# Altium PCB PCB1.PcbDoc
Units mm, origin at the board's own origin, x right, y up, seen from the top; angles counter-clockwise.
Board outline 49.91 x 77.34 mm, 4 copper layers (Top Layer, Layer 1, Layer 2, Bottom Layer), stack 0.787 mm thick; 23 components, 20 nets, 117 pads, 8 vias.
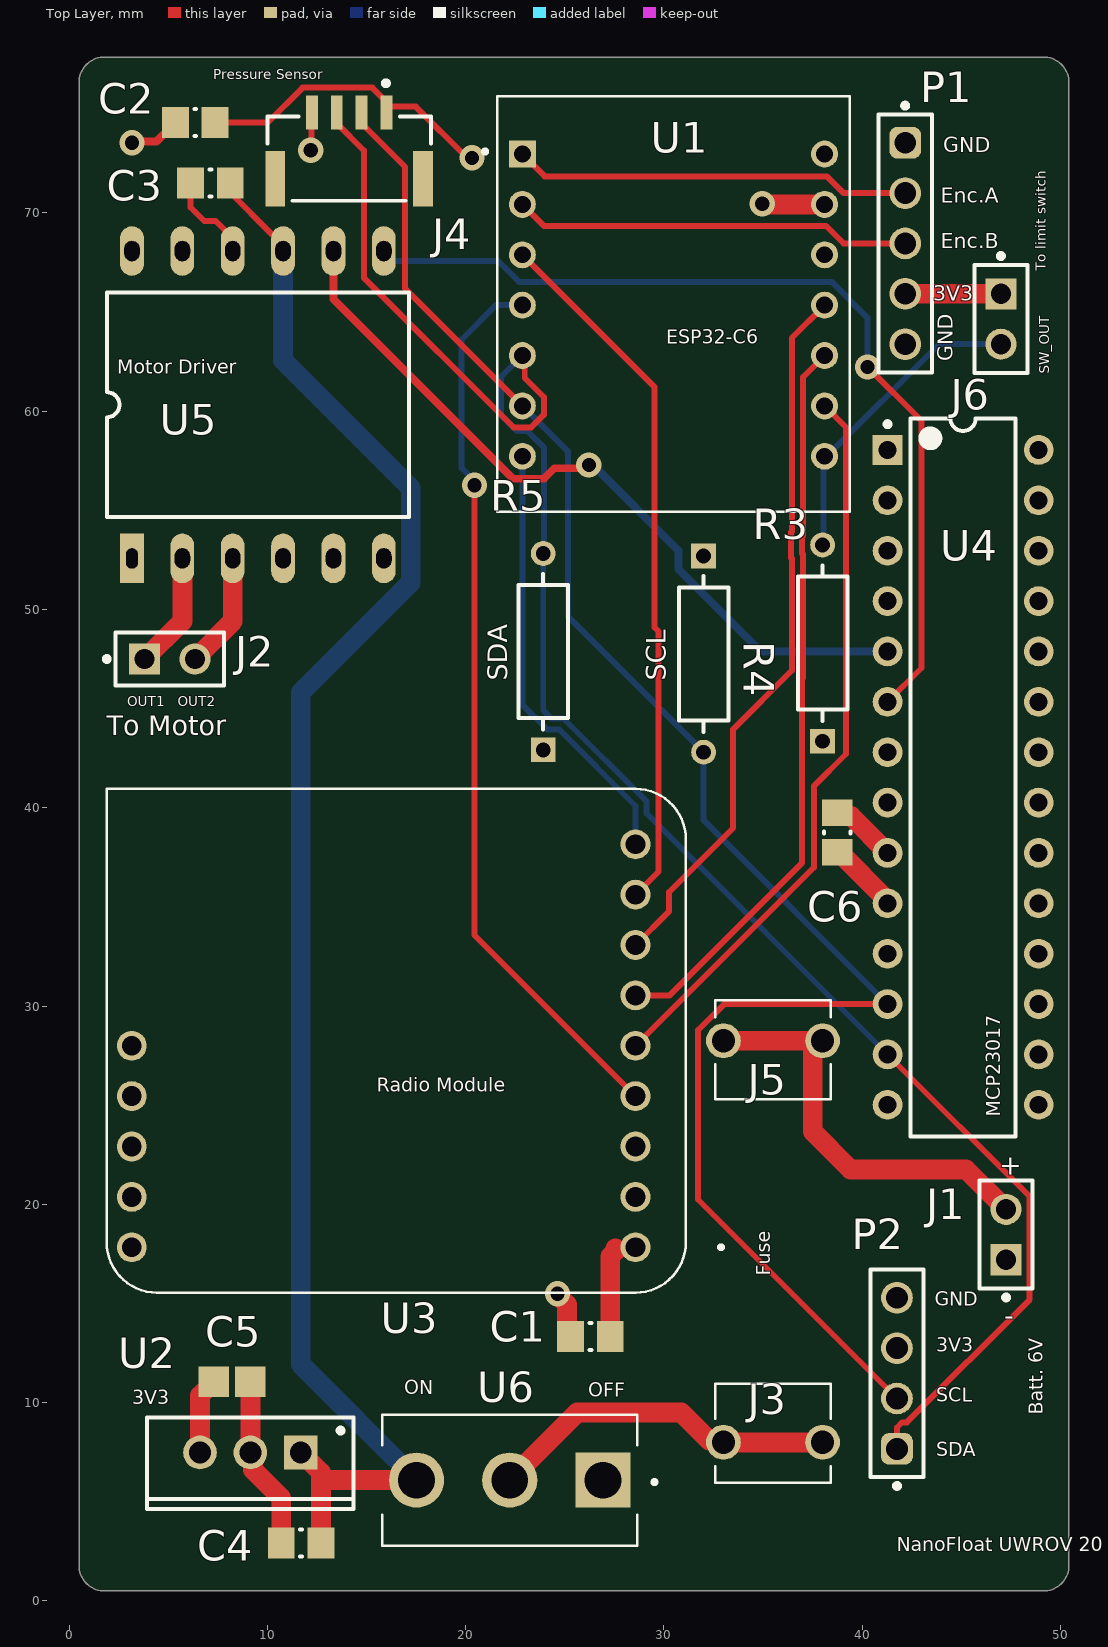
[diagram p0: Top Layer view]
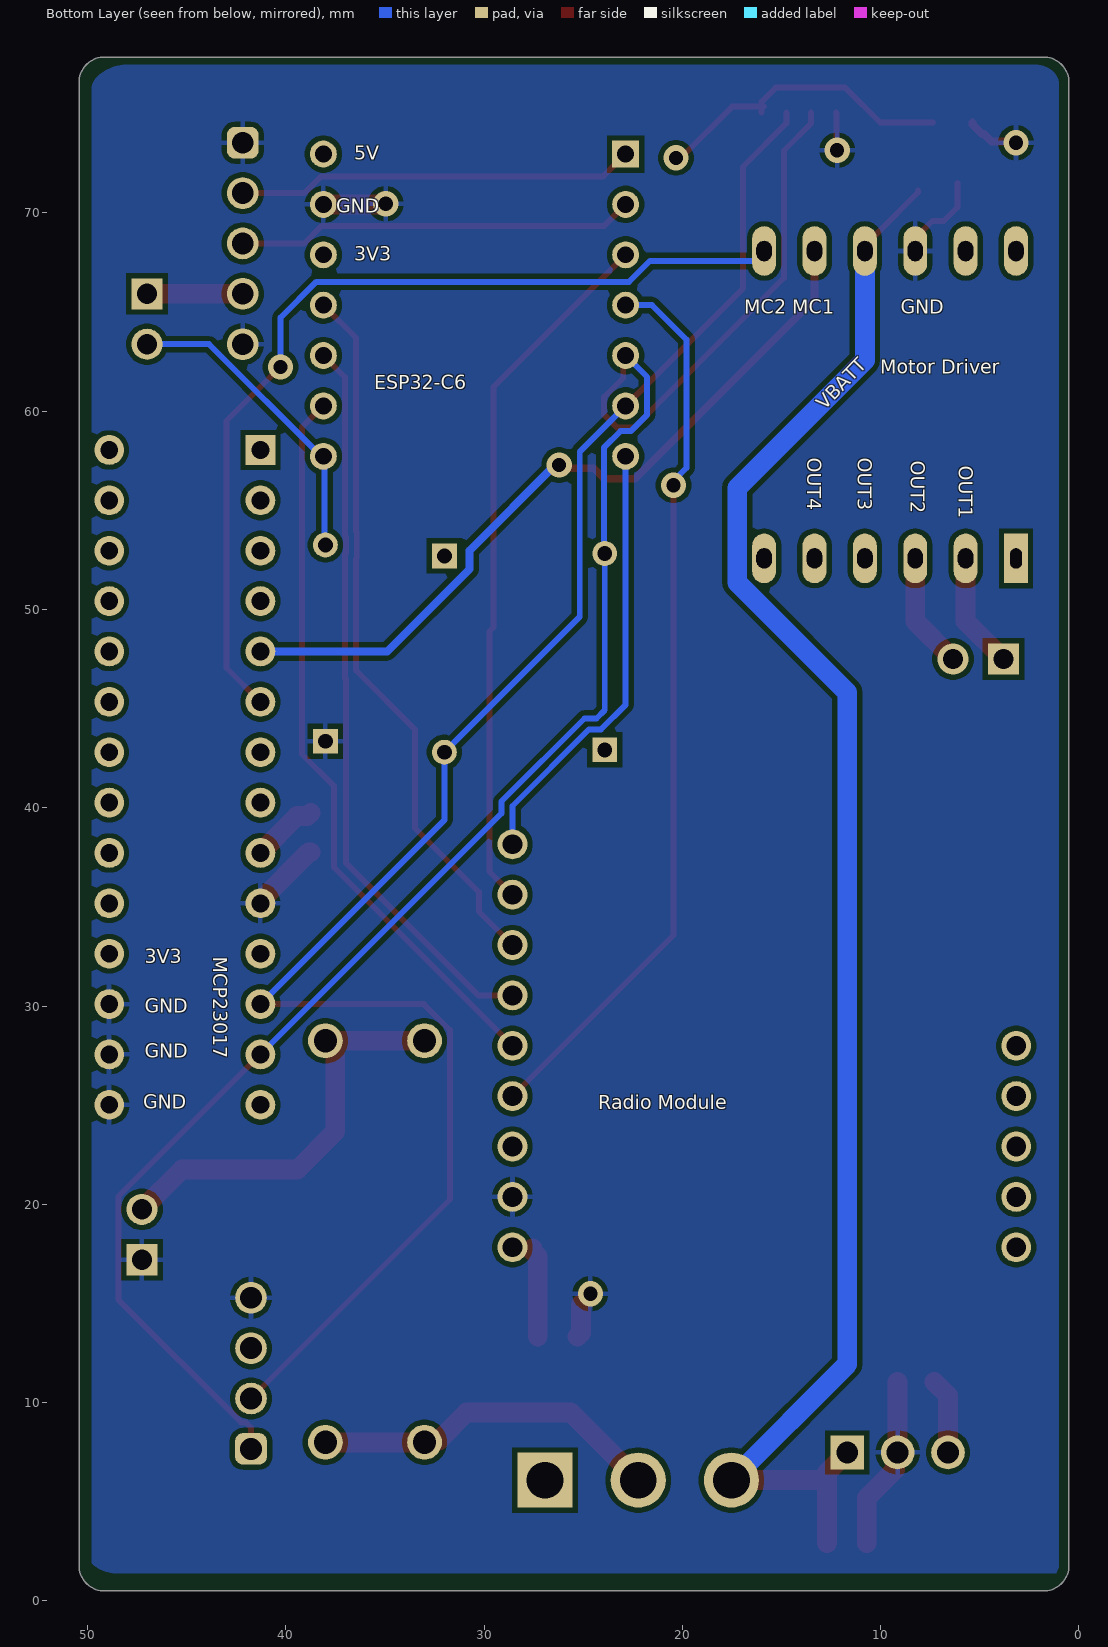
[diagram p1: Bottom Layer view, seen from below]
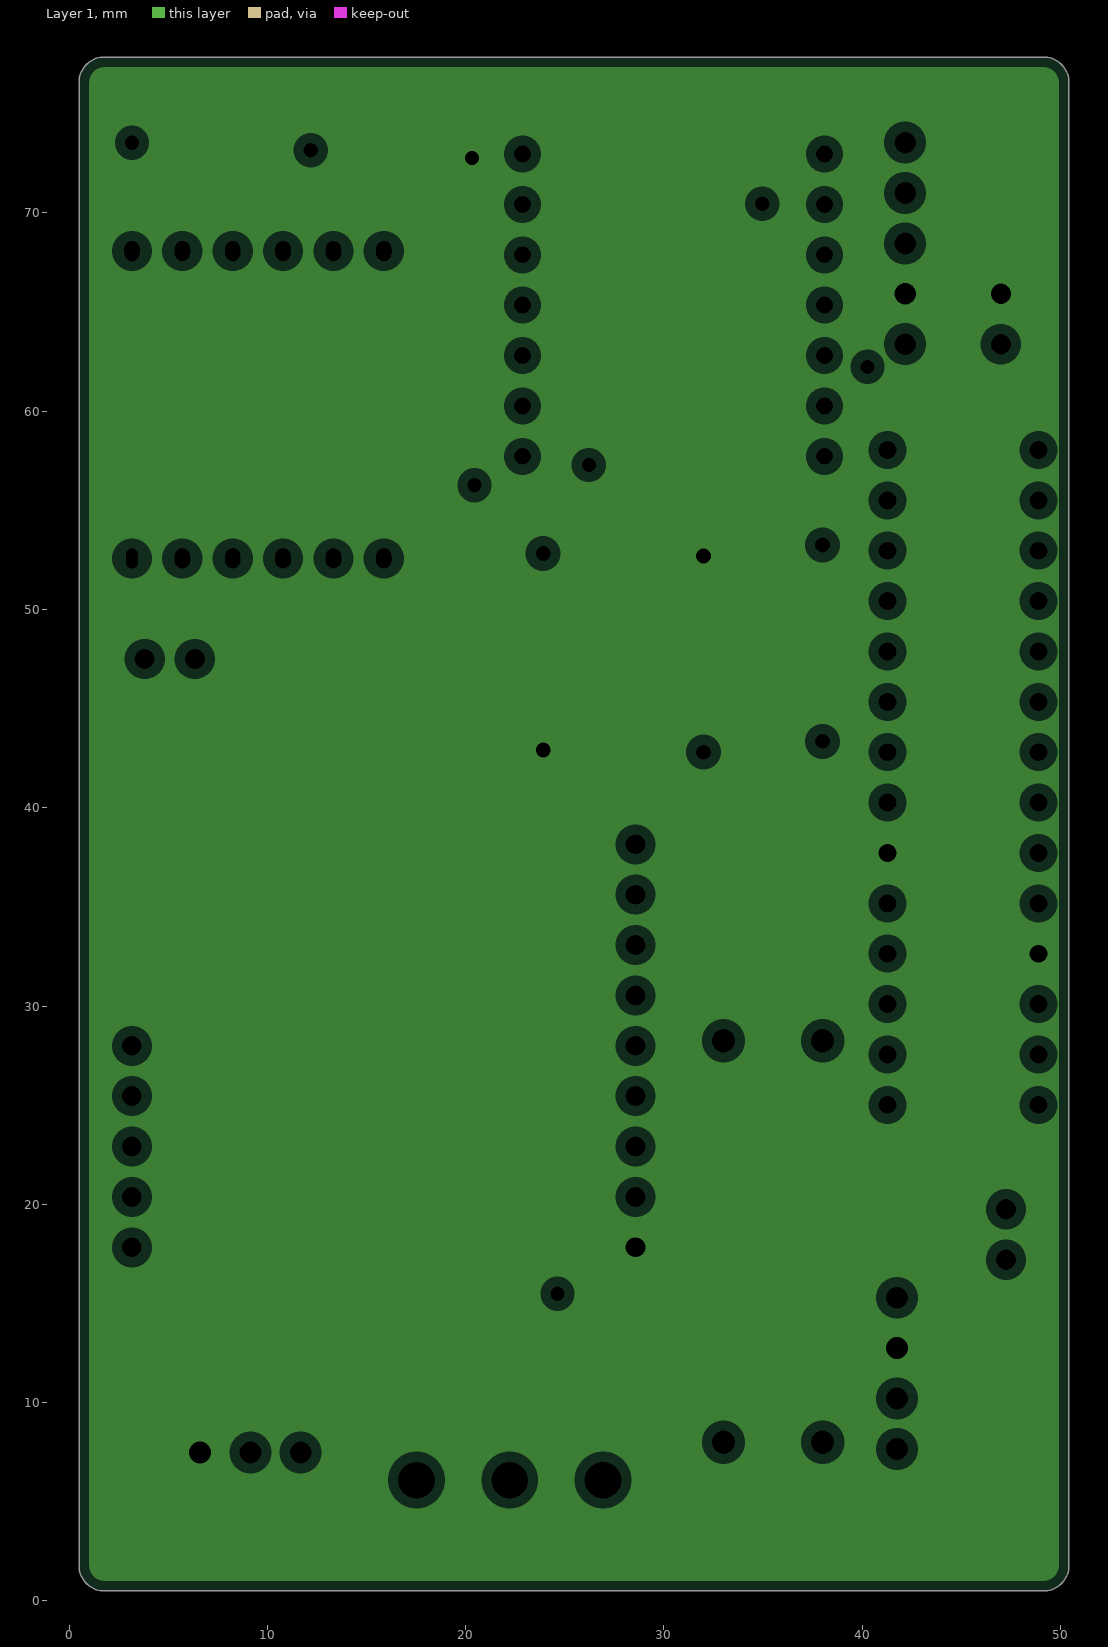
[diagram p2: Layer 1, clearances drawn from the general rule]
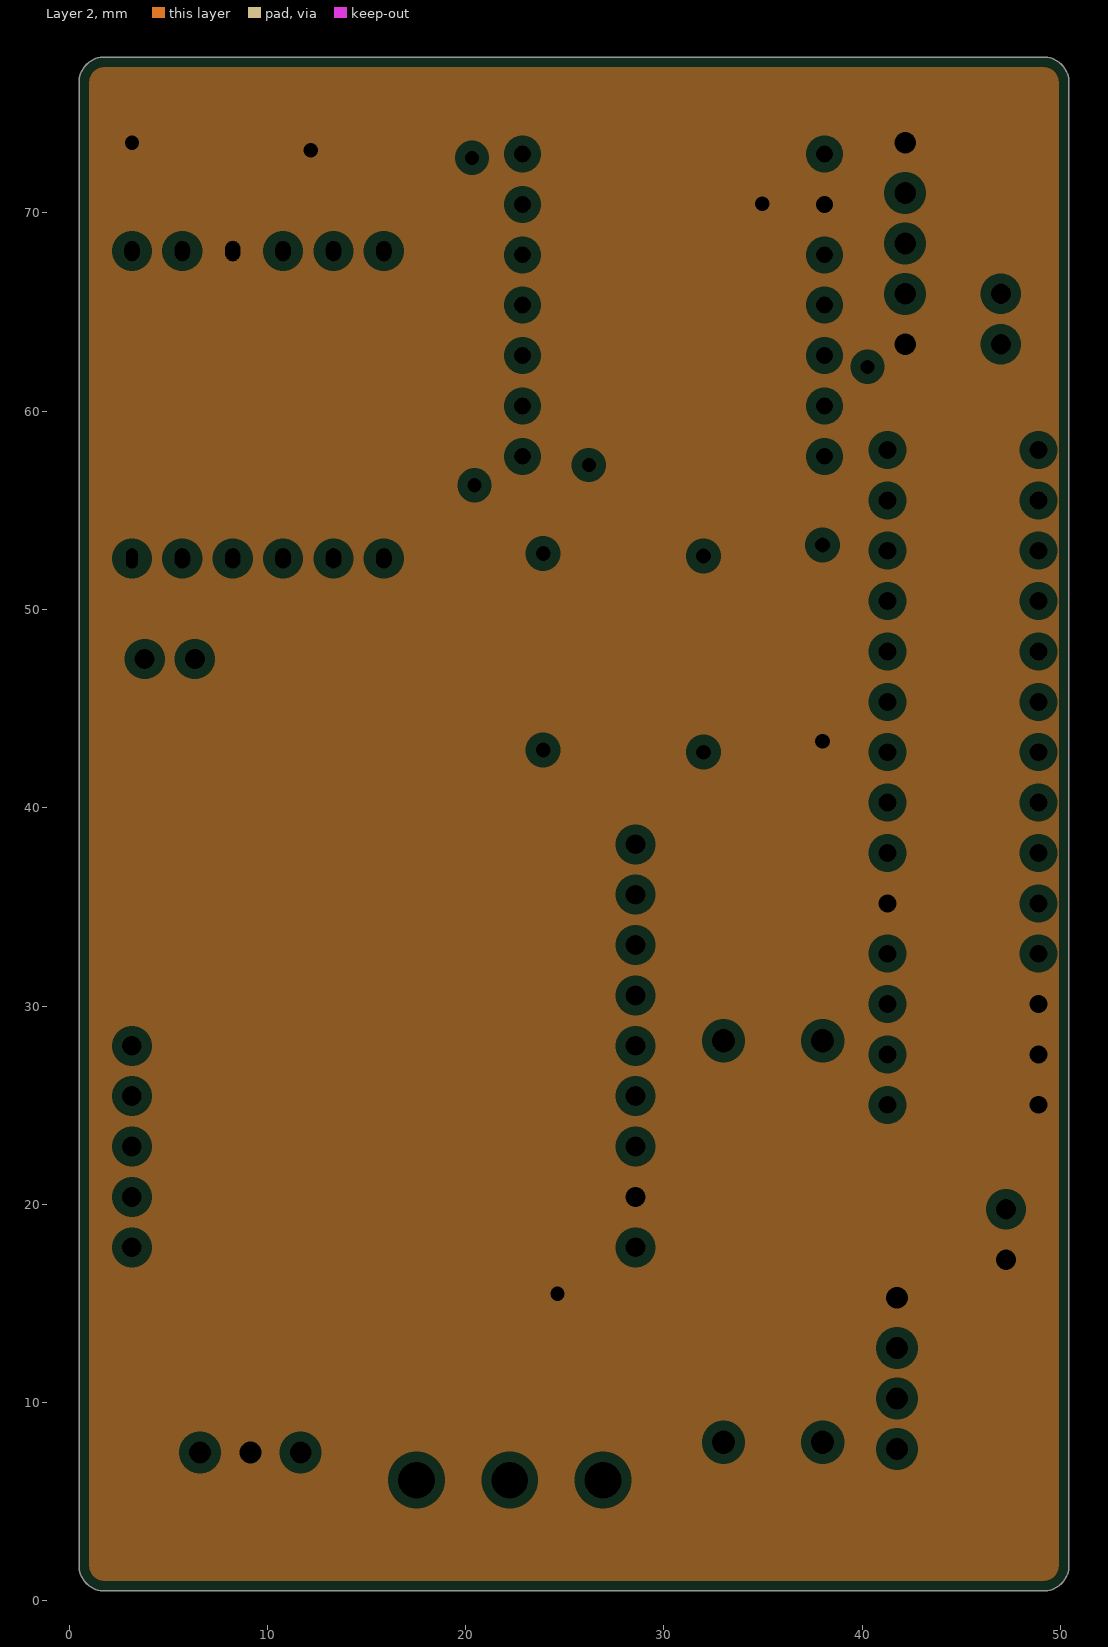
[diagram p3: Layer 2, clearances drawn from the general rule]

## Layer stack, top to bottom
Top Solder: solder mask 0.0102, Solder Resist, Dk 3.5
Top Layer: signal copper 0.0356
Dielectric 2: prepreg 0.1803, PP-021, Dk 4.4
Layer 1: plane copper 0.0175, net 3V3
Dielectric 1: dielectric 0.32, FR-4, Dk 4.8
Layer 2: plane copper 0.0175, net GND
Dielectric 3: prepreg 0.1803, PP-021, Dk 4.4
Bottom Layer: signal copper 0.0356
Bottom Solder: solder mask 0.0102, Solder Resist, Dk 3.5

## Board outline
0.508,1.778 0.508,76.581 cw(c1.778,76.581) 1.778,77.851 49.149,77.851 cw(c49.149,76.581) 50.419,76.581 50.419,1.778 cw(c49.149,1.778) 49.149,0.508 1.778,0.508 cw(c1.778,1.778)

## Design rules (kind name [scope] priority, off if disabled: settings)
Clearance [All] p1: gap=0.254 ignorepadtopadclearanceinfootprint=FALSE
PlaneClearance [All] p1: clearance=0.508
PlaneConnect [All] p1: planeconnectstyle=Relief reliefexpansion=0.508 reliefentries=4 reliefconductorwidth=0.254 reliefairgap=0.254
PolygonConnect [All] p1: connectstyle=Relief reliefconductorwidth=0.254 reliefentries=4 polygonreliefangle="90 Angle" airgapwidth=0.254
RoutingVias [All] p1: holewidth=0.711 width=1.27 viastyle="Through Hole" minholewidth=0.711 minwidth=1.27 maxholewidth=0.711 maxwidth=1.27
SolderMaskExpansion [All] p1: expansion=0.102 istentingtop=FALSE
SupplyNets "Schematic Supply Nets_1" [InNet('GND')] p1: voltage=0.000
SupplyNets "Schematic Supply Nets" [InNet('3V3')] p2: voltage=0.000
Width [All] p1: maxlimit=1 minlimit=0.254 preferedwidth=0.3
28 further rules are at their usual default settings.

## Components (designator, comment, footprint, x,y, rotation, side; value= is the part's Value field where it differs from the comment)
C1 "CAP 100nF 10V 0805(2012)" CAPC0805(2012)100_M 26.289,13.335 r0 top value=100nF
C2 "CAP 100nF 10V 0805(2012)" CAPC0805(2012)100_M 6.366,74.549 r0 top value=100nF
C3 "CAP 100nF 10V 0805(2012)" CAPC0805(2012)100_M 7.128,71.501 r180 top value=100nF
C4 "CAP 100nF 10V 0805(2012)" CAPC0805(2012)100_M 11.7,2.921 r0 top value=100nF
C5 "08053C225MAT2A" CAPC2013X152X50ML20T25 8.219,11.049 r180 top
C6 "CAP 100nF 10V 0805(2012)" CAPC0805(2012)100_M 38.735,38.751 r90 top value=100nF
J1 "TSW-102-07-F-S" FP-TSW-102-07-F-S-MFG 47.25,18.48 r90 top
J2 "TSW-102-07-F-S" FP-TSW-102-07-F-S-MFG 5.08,47.498 r0 top
J3 "Fuse Holder" FUSE_01110501Z 35.5,8.46 r90 top
J4 "BM04B-GHS-TBT(LF)(SN)" FP-BM04B-GHS-TBT_LF_SN-MFG 14.127,72.732 r0 top
J5 "Fuse Holder" FUSE_01110501Z 35.5,27.79 r270 top
J6 "TSW-102-07-F-S" FP-TSW-102-07-F-S-MFG 46.99,64.643 r270 top
P1 "61300511121" 61300511121 42.164,68.453 r270 top
P2 "61300411121" 61300411121 41.75,11.48 r90 top
R3 "RCMM024701GKS14" FP-RCMM02-MFG 38,48.3 r90 top
R4 "RCMM024701GKS14" FP-RCMM02-MFG 32,47.75 r270 top
R5 "RCMM024701GKS14" FP-RCMM02-MFG 23.912,47.87 r90 top
U1 "XIAO_ESP32_C6" MODULE_XIAO_ESP32C6 30.48,65.405 r0 top
U2 "LF33CV" TO220 9.144,7.493 r180 top
U3 "RFM9X_LoRa" RFM9X_LoRa 16.5,28.25 r180 top
U4 "MCP23017-E/SP" SPDIP300-SP28 45.085,41.529 r0 top
U5 "DRV8833" "DRV8833 Motor Driver" 3.175,52.572 r90 top
U6 "EG5137-ND" SW_500SSP1S2M2QEA 22.224,6.096 r180 top

## Footprints (in the part's own frame and the unit in brackets; to place one, negate y for a bottom-side part, rotate by r counter-clockwise, add the part's x,y. Pads: shape width x height; smd on the part's side, far side on the other; paste and mask are expansions set on the pad)
61300411121 [mm] "Pin Header, pitch 2.54 mm, THT, Vertical, single row, 4p"
  rrect50% 1.6x1.6 hole 1.1: 1(-3.81,0)
  round 1.6 hole 1.1: 2(-1.27,0) 3(1.27,0) 4(3.81,0)
  silkscreen extent -5.8,-1.35 5.23,1.35, body extent -5.08,-1.27 5.08,1.27, height 8.57
61300511121 [mm] "Pin Header, pitch 2.54 mm, THT, Vertical, single row, 5p"
  rrect50% 1.6x1.6 hole 1.1: 1(-5.08,0)
  round 1.6 hole 1.1: 2(-2.54,0) 3(0,0) 4(2.54,0) 5(5.08,0)
  silkscreen extent -7.07,-1.35 6.5,1.35, body extent -6.35,-1.27 6.35,1.27, height 8.57
CAPC0805(2012)100_M [mm] "Chip Capacitor, Body 2.0x1.2mm, Height 1.0mm, IPC Low Density"
  rect 1.35x1.55 smd: 1(-1,0) 2(1,0)
  silkscreen extent -0.05,-0.67 0.05,0.67, body extent -1.1,-0.72 1.1,0.72, height 1
CAPC2013X152X50ML20T25 [mm] "Chip Capacitor, 2-Leads, Body 2.01x1.25mm, IPC Low Density"
  rect 1.55x1.55 smd: 1(-0.925,0) 2(0.925,0)
  body extent -1.1,-0.72 1.11,0.72, height 1.52
"DRV8833 Motor Driver" [mm]
  rect 2.5x1.2 hole 0.6 slot 1.016 at 0 deg: 1(0,0)
  oval 2.5x1.2 hole 0.778 slot 1.016 at 0 deg: 2(0,-2.54) 3(0,-5.08) 4(0,-7.62) 5(0,-10.16) 6(0,-12.7) 7(15.5,-12.7) 8(15.5,-10.16) 9(15.5,-7.62) 10(15.5,-5.08) 11(15.5,-2.54) 12(15.5,0)
  silkscreen extent 2.08,-13.97 13.41,1.27
FP-BM04B-GHS-TBT_LF_SN-MFG [mm]
  rect 0.6x1.7 smd paste+0 mask+0: 1(1.875,2.325) 2(0.625,2.325) 3(-0.625,2.325) 4(-1.875,2.325)
  rect 1x2.8 smd paste+0 mask+0: 5(-3.725,-1.025) 6(3.725,-1.025)
  silkscreen extent -4.13,-2.12 4.13,3.92, body extent -4.33,-2.52 4.33,3.27, height 0.25
FP-RCMM02-MFG [mm]
  rect 1.25x1.25 hole 0.75 paste-2539.97 mask+0: 1(-4.95,0)
  round 1.25 hole 0.75 paste-2539.97 mask+0: 2(4.95,0)
  silkscreen extent -3.93,-1.25 3.93,1.25, body extent -5.68,-1.35 5.68,1.35, height 0.25
FP-TSW-102-07-F-S-MFG [mm]
  rect 1.57x1.57 hole 1.02 paste-2539.97 mask+0: 1(-1.27,0)
  round 1.57 hole 1.02 paste-2539.97 mask+0: 2(1.27,0)
  silkscreen extent -3.3,-1.34 2.73,1.34, body extent -2.83,-1.44 2.83,1.44, height 0.25
FUSE_01110501Z [mm]
  round 1.755 hole 1.17 mask+0.102: 1(-0.46,2.5) 2(-0.46,-2.5)
  silkscreen extent -2.5,-2.92 2.5,2.92
MODULE_XIAO_ESP32C6 [mm]
  rect 1.358x1.358 / inner round 1.358 / far side rect 1.358x1.358 hole 0.85 mask+0.102: 1(-7.62,7.556)
  round 1.358 hole 0.85 mask+0.102: 2(-7.62,5.016) 3(-7.62,2.476) 4(-7.62,-0.064) 5(-7.62,-2.603) 6(-7.62,-5.143) 7(-7.62,-7.683) 8(7.62,-7.683) 9(7.62,-5.143) 10(7.62,-2.603) 11(7.62,-0.064) 12(7.62,2.476) 13(7.62,5.016) 14(7.62,7.556)
  silkscreen extent -9.6,-10.48 8.89,10.48, body extent -8.89,-10.48 8.89,11.99, height 4.21
RFM9X_LoRa [mm] "RFM9X_LoRa"
  round 1.508 hole 1: 1(-12.065,10.414) 2(-12.065,7.874) 3(-12.065,5.334) 4(-12.065,2.794) 5(-12.065,0.254) 6(-12.065,-2.286) 7(-12.065,-4.826) 8(-12.065,-7.366) 9(-12.065,-9.906) 10(13.335,0.254) 11(13.335,2.794) 12(13.335,5.334) 13(13.335,7.874) 14(13.335,10.414)
  silkscreen extent -16.47,-12.7 14.61,12.7, body extent -14.61,-12.7 14.61,12.7, height 3.37
SPDIP300-SP28 [mm] "DIP, 28-Pin, Row Spacing 7.62 mm, Pitch 2.54 mm"
  rect 1.5x1.5 hole 0.9: 1(-3.81,16.51)
  round 1.5 hole 0.9: 2(-3.81,13.97) 3(-3.81,11.43) 4(-3.81,8.89) 5(-3.81,6.35) 6(-3.81,3.81) 7(-3.81,1.27) 8(-3.81,-1.27) 9(-3.81,-3.81) 10(-3.81,-6.35) 11(-3.81,-8.89) 12(-3.81,-11.43) 13(-3.81,-13.97) 14(-3.81,-16.51) 15(3.81,-16.51) 16(3.81,-13.97) 17(3.81,-11.43) 18(3.81,-8.89) 19(3.81,-6.35) 20(3.81,-3.81) 21(3.81,-1.27) 22(3.81,1.27) 23(3.81,3.81) 24(3.81,6.35) 25(3.81,8.89) 26(3.81,11.43) 27(3.81,13.97) 28(3.81,16.51)
  silkscreen extent -3.93,-18.1 2.65,18.1, body extent -3.55,-18.1 3.55,18.1, height 5.33
SW_500SSP1S2M2QEA [mm]
  rect 2.775x2.775 / inner round 2.775 / far side rect 2.775x2.775 hole 1.85 mask+0.102: 1(-4.7,0)
  round 2.775 hole 1.85 mask+0.102: 2(0,0) 3(4.7,0)
  silkscreen extent -7.4,-3.3 6.43,3.3
TO220 [mm] "TO, Thru-Hole, Vertical, Heatsink Mounted; 3 In-Line Leads; Pitch 2.54 mm"
  rect 1.7x1.7 hole 1.1: 1(-2.54,0)
  round 1.7 hole 1.1: 2(0,0) 3(2.54,0)
  silkscreen extent -5.2,-1.75 5.2,2.85, body extent -5.25,-1.8 5.25,2.9, height 19.7

## Part data
C1 C2 C3 C4 C6: library part CMP-1036-04393-1, "CAP 100nF 10V ±5% 0805 (2012 Metric) Thickness 1mm SMD", Case-EIA=0805, Case-Metric=2012, Rated Voltage="10 V", Tolerance=Â±5%, Max Thickness="1 mm", Technology=SMT
C5: library part CMP-2007-04515-1, Manufacturer="AVX Interconnect / Elco", Part Number=08053C225MAT2A
J1 J2 J6: library part CMP-02766-001458-1, "CONN HEADER VERT 2POS 2.54MM", Color=Black, Flammability Rating="UL94 V-0", Max Current Rating=7.6A, Max Operating Temperature=125°C, Max Voltage Rating (AC)=550V, Min Operating Temperature=-55°C, Package Quantity=1, Connector Type=Header, Contact Finish - Mating=GOLD, Contact Material=Bronze, Contact Mating Length=0.23inch, Contact Plating=Gold, Contact Shape=Square, Contact Type="Male Pin", Depth=2.54mm, Fastening Type=Pull, Gender=Male, Housing Color=Black, Housing Material=Polyester, Insulation Color=Black, Insulation Material=PBT, Length=5.08mm, Mount="Through Hole", Number of Contacts=2, Number of Positions=2, Number of Rows=1, Orientation=Straight, Packaging=Bulk, Pitch=2.54mm, Radiation Hardening=No, REACH SVHC="No SVHC", RoHS Compliant=Yes, Series=TSW, Termination=Solder
J3 J5: library part Fuse_Holder
J4: library part CMP-17439-000062-2, "CONN HEADER SMD 4POS 1.25MM", Case/Package=SMD/SMT, Current Rating=1A, Housing Color=Natural, Max Operating Temperature=85°C, Min Operating Temperature=-25°C, Voltage Rating=50V, Contact Material=Bronze, Contact Plating=Tin, Gender=Male, Housing Material=Nylon, Lead Free="Lead Free", Number of Contacts=4, Number of Positions=4, Number of Rows=4, Orientation=Straight, Packaging="Cut Tape", Pitch=1.25mm, REACH SVHC="No SVHC", Series=GH, Termination=Crimp, Voltage Rating (AC)=50V, Wire/Cable Gauge=26AWG
P1: library part CMP-1502-01068-4, "THT Vertical Pin Header WR-PHD, Pitch 2.54 mm, Single Row, 5 pins", Color=Black, Contact Resistance=20mΩ, Current Rating=3A, Max Operating Temperature=105°C, Min Operating Temperature=-40°C, Operating Supply Voltage=250V, Connector Type="Male Pin", Contact Material=Gold, Contact Mating Length=5.9944mm, Contact Plating=Gold, Gender=Male, Height=8.89mm, Lead Free="Lead Free", Lead Pitch=2.54mm, Mount="Through Hole", Number of Contacts=5, Number of Pins=5, Number of Positions=5, Number of Rows=1, Orientation=Vertical, Packaging=Bulk, Pitch=2.54mm, RoHS=Compliant, Termination=Solder, Voltage Rating=250V
P2: library part CMP-1502-01064-4, "THT Vertical Pin Header WR-PHD, Pitch 2.54 mm, Single Row, 4 pins", Color=Black, Contact Resistance=20mΩ, Current Rating=3A, Max Operating Temperature=105°C, Min Operating Temperature=-40°C, Operating Supply Voltage=250V, Connector Type="Male Pin", Contact Material=Gold, Contact Mating Length=5.9944mm, Contact Plating=Gold, Gender=Male, Height=8.89mm, Lead Free="Lead Free", Lead Pitch=2.54mm, Mount="Through Hole", Number of Contacts=4, Number of Pins=4, Number of Positions=4, Number of Rows=1, Orientation=Vertical, Packaging=Bulk, Pitch=2.54mm, RoHS=Compliant, Termination=Solder, Voltage Rating=250V
R3 R4 R5: library part CMP-02408-000034-1, "RES 4.7K OHM 2% 1/2W AXIAL", Case/Package=Molded, Resistance=4.7kR, Resistor Type="Metal Film", Temperature Coefficient=100ppm/°C, Tolerance=2%, Contact Plating=Tin, Diameter=2.5mm, Length=6.5mm, Mount="Through Hole", RoHS Compliant=Yes
U1: "seeed studio FCC ID:Z4T-XIAOESP32C6"
U2: library part CMP-0244-00432-1, "500mA, Very Low Drop (0.45V) Voltage Regulator, 3.3V, 3-Pin TO-220", ComponentLink1Description="Manufacturer URL", ComponentLink1URL=http://www.st.com, ComponentLink2Description=Datasheet, ComponentLink2URL=http://www.st.com/internet/com/TECHNICAL_RESOURCES/TECHNICAL_LITERATURE/DATASHEET/CD00000546.pdf, ComponentLink3Description="Package Specification", ComponentLink3URL=http://www.st.com/internet/com/TECHNICAL_RESOURCES/TECHNICAL_LITERATURE/PACKAGE_INFORMATION/CD00004649.pdf, DatasheetVersion=1/11/2010, PackageDescription="TO, Thru-Hole, Vertical, Heatsink Mounted; 3 In-Line Leads; Pitch 2.54 mm", PackageReference=TO220, PackageVersion=ver3.0
U4: library part CMP-0186-00081-2, "16-Bit I/O Expander with Serial Interface, 28-Pin SPDIP, Extended Temperature", ComponentLink1Description="Manufacturer URL", ComponentLink1URL=http://www.microchip.com/, ComponentLink2Description=Datasheet, ComponentLink2URL=http://ww1.microchip.com/downloads/en/DeviceDoc/21952b.pdf, ComponentLink3Description="Package Specification", ComponentLink3URL=http://www.microchip.com/stellent/groups/techpub_sg/documents/packagingspec/en012702.pdf, DatasheetVersion="revB, Feb-2007", PackageDescription="28-Lead Skinny Plastic Dual In-Line (SP) - 300 mil Body [SPDIP]", PackageReference=SPDIP300-SP28, PackageVersion="revBB, Aug-2009", RevisionNote="URLs added."
U5: "Motor Driver 6.5V-45VDC In"
U6: library part 500SSP1S2M2QEA, "Switch Slide ON None ON SPDT Extended Top Slide 5A 250VAC 28VDC PC Pins Thru-Hole", Contact Current Rating=2A, Contact Resistance=10mΩ, Contact Voltage Rating (AC)=250V, Current Rating=5A, Insulation Resistance=1GΩ, Manufacturer=E-Switch, Max Operating Temperature=85°C, Max Voltage Rating (DC)=28V, Min Operating Temperature=-30°C, Voltage Rating (AC)=120V, Actuator Length=7.239mm, Actuator Material=Nylon, Category="Slide Switches", ComponentLink1Description=https://datasheet.octopart.com:443/500SSP1S2M2QEA-E-Switch-datasheet-41192586.pdf?src-supplier=element14+APAC, ComponentLink1URL=https://datasheet.octopart.com:443/500SSP1S2M2QEA-E-Switch-datasheet-41192586.pdf?src-supplier=element14+APAC, ComponentLink2Description=https://datasheet.octopart.com:443/500SSP1S2M2QEA-E-Switch-datasheet-156105959.pdf?src-supplier=Future+Electronics, ComponentLink2URL=https://datasheet.octopart.com:443/500SSP1S2M2QEA-E-Switch-datasheet-156105959.pdf?src-supplier=Future+Electronics, ComponentLink3Description=https://datasheet.octopart.com:443/500SSP1S2M2QEA-E-Switch-datasheet-169364037.pdf?src-supplier=New+Yorker+Electronics, ComponentLink3URL=https://datasheet.octopart.com:443/500SSP1S2M2QEA-E-Switch-datasheet-169364037.pdf?src-supplier=New+Yorker+Electronics, ComponentLink4Description=https://datasheet.octopart.com:443/500SSP1S2M2QEA-E-Switch-datasheet-33408909.pdf?src-supplier=Electro+Sonic, ComponentLink4URL=https://datasheet.octopart.com:443/500SSP1S2M2QEA-E-Switch-datasheet-33408909.pdf?src-supplier=Electro+Sonic, Contact Material=Copper, Contact Plating=Silver, Electrical Life=30kcycles, Export Control Classification Number (ECCN) Code=EAR99, Harmonized Tariff Schedule (HTS) Code=8536.50.70.00, Housing Material="Stainless Steel", Introduction Date=2000-02-16, Length=12.8524mm, Lifecycle Status=Production, Manufacturer Part Number=500SSP1S2M2QEA, Max Current Rating=5A, Mechanical Life=30kcycles, Mounting Technology="Through Hole", Number of Positions=1, Orientation=Vertical, Pricing="1=3.29, 10=2.758, 25=2.556, 126=2.23468, 252=2.11369, 504=2.00373, 1008=1.90486, 2520=1.79075, 5040=1.71628 (USD)", REACH SVHC=Yes, RoHS=Compliant, Sealable=EPOXY, Stock=7980, Supplier=DigiKey, Supplier Part Number=EG5137-ND, Switch Function=On-On, Switch Travel=2.16mm, Termination="PC Pin", Throw Configuration=SPDT, Voltage Rating (DC)=28V

## Via types
v1: diameter 1.27, hole 0.711, Top Layer to Bottom Layer, 8 vias

## Nets (pads, with @x,y where several pads share a name; then routed paths per layer and width w, separated by ;. In a path a pad name is that pad's centre, name@x,y a point inside that pad or via, vN(x,y) a via of type N, cw(c..) or ccw(c..) an arc to the next point about the centre after c; other vN are vias at no path point)
3V3: C1.2 C2.2 C5.2 C6.2 J4.1 J6.1 P1.4 P2.3 R4.1 R5.1 U2.3 U3.1 U4.9 U4.18 | length 32.3
  Top Layer w0.3: C2.2 10.023,74.549 11.785,76.311 15.298,76.311 16.002,75.607 J4.1 ; J4.1@15.875,75.35 17.487,75.35 20.066,72.771 v1(20.32,72.771)
  Top Layer w1: U2.3 6.604,10.359 C5.2 ; C1.2 27.289,17.373 27.559,17.643 27.559,17.78 ; C6.2 38.91,39.576 39.426,39.576 41.275,37.727 U4.9 ; P1.4 J6.1
ENCODER_A: P1.2 U1.1 | length 20.1
  Top Layer w0.3: U1.1 23.984,71.837 38.216,71.837 39.06,70.993 P1.2
ENCODER_B: P1.3 U1.2 | length 20.1
  Top Layer w0.3: U1.2 23.943,69.338 38.175,69.338 39.06,68.453 P1.3
GND: C1.1 C2.1 C3.2 C4.1 C5.1 C6.1 J1.1 J4.4 P1.1 P1.5 P2.4 R3.1 U1.13 U2.2 U3.2 U4.10 U4.15 U4.16 U4.17 U5.10 | length 27.3
  Top Layer w0.3: C3.2 6.128,70.276 6.819,69.585 7.392,69.585 8.255,68.722 U5.10 ; v1(12.192,73.152) 12.222,73.182 12.222,75.027 J4.4
  Top Layer w0.4: v1(3.175,73.533) 3.235,73.593 4.41,73.593 4.791,73.974 4.891,73.974 5.366,74.449 C2.1
  Top Layer w1: C5.1 U2.2 9.278,7.359 9.278,6.618 10.7,5.196 C4.1 ; v1(24.638,15.494) 24.638,15.421 25.114,14.945 25.114,13.51 C1.1 ; v1@34.925,70.485 34.989,70.421 U1.13 ; C6.1 38.835,37.751 41.275,35.311 U4.10
  other v1: 34.957,70.453
MC1: U4.5 U5.8 | length 38.8
  Top Layer w0.4: U5.8 13.335,65.644 22.391,56.588 23.941,56.588 24.47,57.118 26.051,57.118 v1(26.211,57.277)
  Bottom Layer w0.4: v1(26.211,57.277) 26.416,57.277 30.731,52.962 30.731,52.027 34.879,47.879 U4.5
MC2: U4.6 U5.7 | length 47
  Top Layer w0.3: v1(40.259,62.23) 42.983,59.506 42.983,47.047 U4.6
  Bottom Layer w0.3: U5.7 15.875,67.988 16.291,67.572 21.638,67.572 22.69,66.52 38.453,66.52 40.259,64.714 v1(40.259,62.23)
NetJ2_1: J2.1 U5.2 | length 5.9
  Top Layer w1: J2.1 5.715,49.403 U5.2
NetJ2_2: J2.2 U5.3 | length 5.9
  Top Layer w1: J2.2 8.255,49.403 U5.3
RADIO_CS: U1.3 U3.8 | length 35.6
  Top Layer w0.3: U1.3 29.532,61.21 29.532,49.088 29.723,48.896 29.723,36.774 U3.8
RADIO_G0_INT: U1.4 U3.4 | length 45.6
  Top Layer w0.3: v1(20.447,56.261) 20.447,33.574 U3.4
  Bottom Layer w0.3: v1(20.447,56.261) 20.447,56.479 19.789,57.137 19.789,63.604 21.526,65.341 U1.4
RADIO_MISO: U1.10 U3.6 | length 37.2
  Top Layer w0.3: U3.6 30.286,30.536 36.971,37.221 36.971,46.503 37.002,46.534 37.002,52.793 36.971,52.824 36.971,53.676 37.017,53.722 37.017,61.718 U1.10
RADIO_MOSI: U1.11 U3.7 | length 36.2
  Top Layer w0.3: U3.7 30.25,34.761 30.25,35.75 30.264,35.75 33.49,38.976 33.49,43.958 36.448,46.917 36.448,52.563 36.417,52.594 36.417,53.906 36.448,53.937 36.448,63.69 U1.11
RADIO_RST: U1.7 U3.9 | length 22.3
  Bottom Layer w0.3: U1.7 22.86,45.191 24.102,43.949 24.705,43.949 28.565,40.088 U3.9
RADIO_SCK: U1.9 U3.5 | length 37.1
  Top Layer w0.3: U3.5 37.556,36.987 37.556,41.085 39.183,42.712 39.183,59.178 U1.9
SCL: J4.2 P2.2 R4.2 U1.6 U4.12 | length 88.8
  Top Layer w0.3: J4.2 14.752,74.507 16.948,72.311 16.948,66.174 U1.6 ; U4.12 33.037,30.099 31.718,28.781 31.718,20.242 P2.2
  Bottom Layer w0.3: U1.6 25.172,57.95 25.172,49.628 R4.2 32,39.374 U4.12
SDA: J4.3 P2.1 R5.2 U1.5 U4.13 | length 95
  Top Layer w0.3: J4.3 13.502,74.507 14.871,73.138 14.871,66.719 22.411,59.178 23.309,59.178 23.943,59.813 23.943,60.71 22.981,61.673 22.981,62.681 U1.5 ; U4.13 48.439,20.395 48.439,15.196 42.249,9.006 42.006,9.006 41.75,8.75 P2.1
  Bottom Layer w0.3: U1.5 21.777,61.718 21.777,59.813 22.598,58.991 23.122,58.991 23.943,58.17 23.943,52.85 R5.2 23.912,44.922 24.331,44.503 24.934,44.503 29.119,40.318 29.119,39.715 U4.13
SWITCH_OUT: J6.2 R3.2 U1.8 | length 15.7
  Bottom Layer w0.3: R3.2 38.05,53.3 38.05,57.672 U1.8 38.215,57.721 43.867,63.373 J6.2
TERM_1: J3.1 J3.2 U6.2 | length 17.3
  Top Layer w1: U6.2 25.628,9.5 30.876,9.5 32.296,8.08 J3.1@32.5,8.08 ; J3.1 J3.2
TERM_2: J1.2 J5.1 J5.2 | length 20.9
  Top Layer w1: J5.2 J5.1 ; J5.1@37.5,28.21 37.5,23.667 39.404,21.763 45.237,21.763 J1.2
VBATT: C3.1 C4.2 U2.1 U5.9 U6.3 | length 83
  Top Layer w0.3: C3.1@8.128,71.12 8.128,71.02 10.254,68.894 10.379,68.894 10.795,68.478 U5.9
  Top Layer w1: U2.1 12.7,6.477 12.7,6.096 C4.2 ; 13.081,6.096 U6.3
  Bottom Layer w1: U5.9 10.795,62.562 17.229,56.128 17.229,51.361 11.684,45.816 11.684,11.936 U6.3
pads on no net: J4.5 J4.6 U1.12 U1.14 U3.3 U3.10 U3.11 U3.12 U3.13 U3.14 U4.1 U4.2 U4.3 U4.4 U4.7 U4.8 U4.11 U4.14 U4.19 U4.20 U4.21 U4.22 U4.23 U4.24 U4.25 U4.26 U4.27 U4.28 U5.1 U5.4 U5.5 U5.6 U5.11 U5.12 U6.1

## Polygon pours and split planes (outlines as drawn)
GND on Bottom Layer "GND_L04_P000" (solid, pour order 0): 48.558,1.397 ccw(c48.558,3.131) 49.784,1.905 49.784,76.222 ccw(c48.917,76.222) 49.53,76.835 ccw(c47.997,75.302) 47.997,77.47 2.19,77.47 ccw(c2.19,76.169) 1.27,77.089 ccw(c1.883,76.476) 1.016,76.476 1.016,1.704 ccw(c1.45,1.704) 1.143,1.397 1.016,1.704 ccw(c1.45,1.704) 1.143,1.397
GND on Layer 2 (split plane): 49.268,77.333 49.384,77.306 49.495,77.26 49.597,77.197 49.688,77.12 49.765,77.029 49.828,76.927 49.874,76.816 49.901,76.7 49.91,76.594 49.909,76.581 49.909,1.778 49.91,1.765 49.901,1.659 49.874,1.543 49.828,1.432 49.765,1.33 49.688,1.239 49.597,1.162 49.495,1.099 49.384,1.053 49.268,1.026 49.162,1.017 49.149,1.018 1.778,1.018 1.765,1.017 1.659,1.026 1.543,1.053 1.432,1.099 1.33,1.162 1.239,1.239 1.162,1.33 1.099,1.432 1.053,1.543 1.026,1.659 1.017,1.765 1.018,1.778 1.018,76.581 1.017,76.594 1.026,76.7 1.053,76.816 1.099,76.927 1.162,77.029 1.239,77.12 1.33,77.197 1.432,77.26 1.543,77.306 1.659,77.333 1.765,77.342 1.778,77.341 49.149,77.341 49.162,77.342
3V3 on Layer 1 (split plane): 49.268,77.333 49.384,77.306 49.495,77.26 49.597,77.197 49.688,77.12 49.765,77.029 49.828,76.927 49.874,76.816 49.901,76.7 49.91,76.594 49.909,76.581 49.909,1.778 49.91,1.765 49.901,1.659 49.874,1.543 49.828,1.432 49.765,1.33 49.688,1.239 49.597,1.162 49.495,1.099 49.384,1.053 49.268,1.026 49.162,1.017 49.149,1.018 1.778,1.018 1.765,1.017 1.659,1.026 1.543,1.053 1.432,1.099 1.33,1.162 1.239,1.239 1.162,1.33 1.099,1.432 1.053,1.543 1.026,1.659 1.017,1.765 1.018,1.778 1.018,76.581 1.017,76.594 1.026,76.7 1.053,76.816 1.099,76.927 1.162,77.029 1.239,77.12 1.33,77.197 1.432,77.26 1.543,77.306 1.659,77.333 1.765,77.342 1.778,77.341 49.149,77.341 49.162,77.342

## Silkscreen, mask and mechanical layers (free items; w line width, h text height)
Top Overlay:
  text "Pressure Sensor" at 7.262,76.731 h0.5
  text "GND" at 44.092,73.048 h0.75
  text "Enc.A" at 43.965,70.508 h0.75
  text "Enc.B" at 43.965,68.222 h0.75
  text "To limit switch" at 49.253,67.079 h0.5 r90
  text "3V3" at 43.584,65.555 h0.75
  text "ESP32-C6" at 30.122,63.396 h0.7
  text "GND" at 44.554,62.507 h0.75 r90
  text "Motor Driver" at 2.436,61.872 h0.7
  text "SW_OUT" at 49.424,61.872 h0.5 r90
  text "SDA" at 22.1,46.4 h1 r90
  text "SCL" at 30.1,46.4 h1 r90
  text "OUT1" at 2.944,45.108 h0.5
  text "OUT2" at 5.484,45.108 h0.5
  text "To Motor" at 1.9,43.65 h1
  text "Radio Module" at 15.517,25.677 h0.7
  text "MCP23017" at 46.967,24.407 h0.7 r90
  text "+" at 46.9,21.483 h1
  text "Fuse" at 35.35,16.4 h0.7 r90
  text "GND" at 43.65,14.9 h0.7
  text "-" at 47.15,13.9 h1
  text "3V3" at 43.722,12.558 h0.7
  text "ON" at 16.914,10.437 h0.7
  text "OFF" at 26.185,10.31 h0.7
  text "SCL" at 43.722,10.058 h0.7
  text "3V3" at 3.198,9.929 h0.7
  text "Batt. 6V" at 49.1,9.4 h0.7 r90
  text "SDA" at 43.722,7.308 h0.7
  text "NanoFloat UWROV 2026" at 41.75,2.5 h0.7
Bottom Overlay:
  text "OUT1" at -34.427,83.254 h0.7 r90
  text "5V" at 36.553,72.667 h0.7
  text "GND" at 37.442,70 h0.7
  text "3V3" at 36.553,67.587 h0.7
  text "GND" at 8.994,64.92 h0.7
  text "MC1" at 14.455,64.92 h0.7
  text "MC2" at 16.868,64.92 h0.7
  text "Motor Driver" at 10.01,61.872 h0.7
  text "ESP32-C6" at 35.537,61.11 h0.7
  text "VBATT" at 12.832,60.029 h0.7 r313.78
  text "OUT3" at 11.153,57.635 h0.7 r90
  text "OUT4" at 13.693,57.635 h0.7 r90
  text "OUT2" at 8.486,57.508 h0.7 r90
  text "OUT1" at 6.073,57.254 h0.7 r90
  text "MCP23017" at 43.665,32.489 h0.7 r90
  text "3V3" at 47.1,32.15 h0.7
  text "GND" at 47.1,29.65 h0.7
  text "GND" at 47.1,27.4 h0.7
  text "GND" at 47.185,24.829 h0.7
  text "Radio Module" at 24.234,24.788 h0.7
Mechanical 1:
  lines w1: 0.508,1.778 ccw(c1.778,1.778) 1.778,0.508 49.149,0.508 ccw(c49.149,1.778) 50.419,1.778 50.419,76.581 ccw(c49.149,76.581) 49.149,77.851 4.064,77.851 1.778,77.851 ccw(c1.778,76.581) 0.508,76.581 0.508,1.778